# EAGLE board Bmp085Shield (EAGLE 7.3.0)
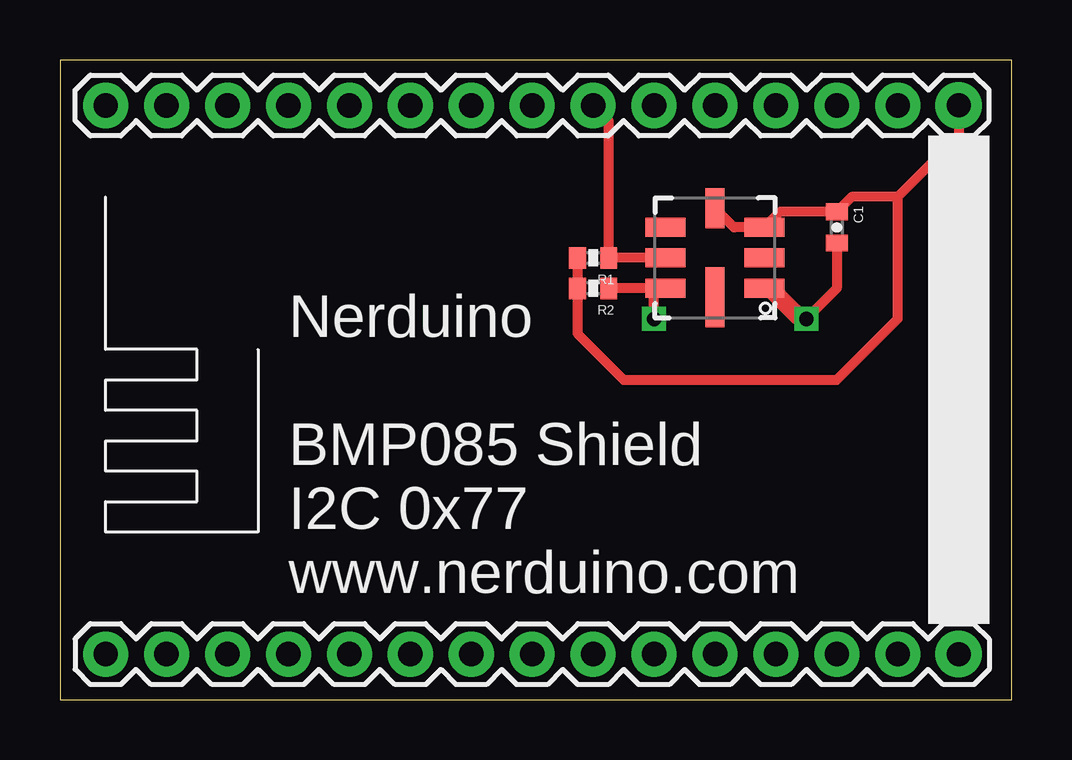
[diagram p0: board, top side]
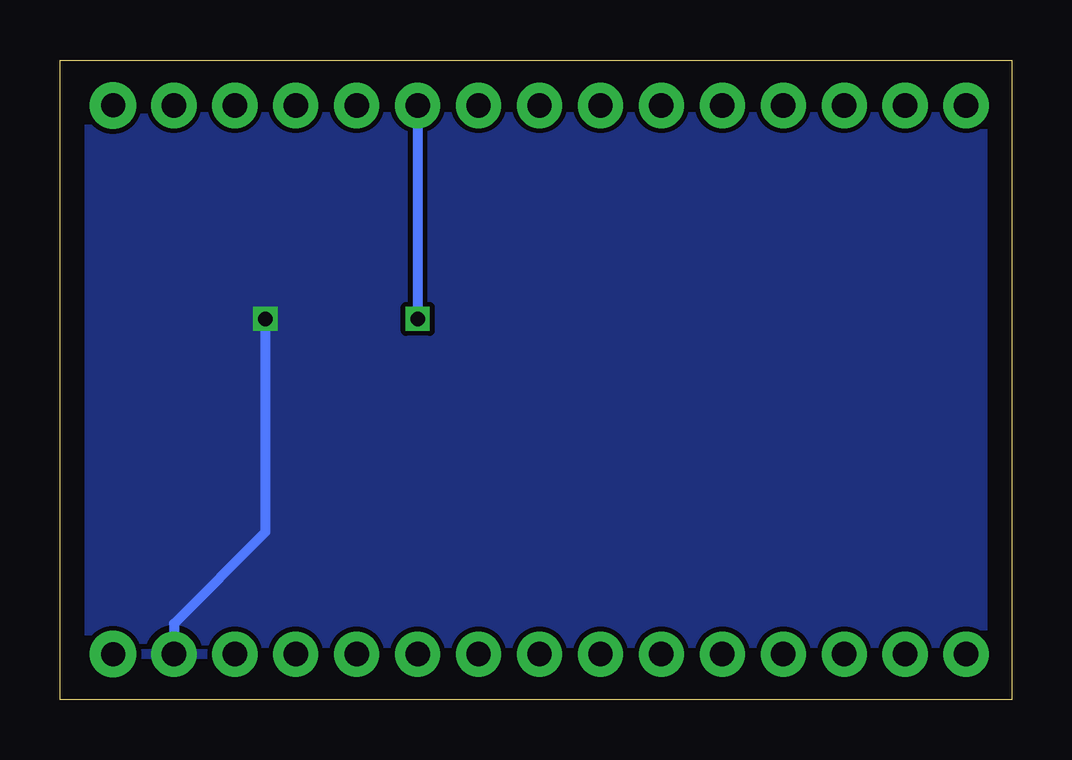
[diagram p1: board, bottom side, seen from below]

Size 39.67 x 26.66 mm. Coordinates in mm from the lower left corner, seen from the top.
Outline: 0,0 39.67,0 39.67,26.66 0,26.66 0,0
Copper layers (1*16): Top 0.035mm / dielectric 1.5mm / Bottom 0.035mm
Design rules "default": minimum track width 10mil, minimum drill 24mil, track to track 8mil, track to pad 8mil, pad to pad 8mil, via to via 8mil, smd to smd 8mil, copper to edge 40mil, drill to drill 8mil, minimum pad ring 10mil, minimum via ring 8mil, stop-mask expansion 4mil, vias tented up to drill 0mil, thermal gap 10mil

## Footprints (pad centres in the part's own frame; a part is rotated, then mirrored left to right if it is on the bottom)
0402-CAP = smd 0.7 x 0.9: 1 -0.65,0; 2 0.65,0
0402-RES = smd 0.7 x 0.9: 1 -0.65,0; 2 0.65,0
NERDUINO_STACK = drill 1.016 pad 1.88: 1 -17.78,-5.08; 2 -15.24,-5.08; 3 -12.7,-5.08; 4 -10.16,-5.08; 5 -7.62,-5.08; 6 -5.08,-5.08; 7 -2.54,-5.08; 8 0,-5.08; 9 2.54,-5.08; 10 5.08,-5.08; 11 7.62,-5.08; 12 10.16,-5.08; 13 12.7,-5.08; 14 15.24,-5.08; 17 15.24,17.78; 18 12.7,17.78; 19 10.16,17.78; 20 7.62,17.78; 21 5.08,17.78; 22 2.54,17.78; 23 0,17.78; 24 -2.54,17.78; 25 -5.08,17.78; 26 -7.62,17.78; 27 -10.16,17.78; 28 -12.7,17.78; 29 -15.24,17.78; 30 -17.78,17.78 | drill 1 pad 1.93: 15 17.78,-5.08; 16 17.78,17.78
BMP085 = smd 1.67 x 0.8: 1 -2.065,1.27; 2 -2.065,0; 3 -2.065,-1.27; 5 2.065,-1.27; 6 2.065,0; 7 2.065,1.27 | smd 0.8 x 1.67: 4 0,-2.065 | smd 0.8 x 2.5: 8 0,1.65

## Placement (x,y rotation side)
C1  0.1uF  [0402-CAP]  32.38,19.69 270 top
R1  4.7k  [0402-RES]  22.23,18.42 180 top
R2  4.7k  [0402-RES]  22.23,17.15 180 top
U$1  NERDSHIELD  [NERDUINO_STACK]  19.69,6.98 0 top
U$2  BMP085  [BMP085]  27.31,18.42 180 top

## Library data of the parts
C1 R1 R2 U$2 = SparkFun
U$1 = NerduinoShieldLib

## Nets
3.3V: C1.1 R1.2 R2.2 U$1.16 U$2.3 U$2.4
GND: C1.2 U$1.14 U$2.1
N$2: R2.1 U$1.21 U$2.7
N$3: R1.1 U$1.22 U$2.6

## Tracks (layer width: path | path; a pad name or v marks a point on that pad's centre or on a via)
3.3V
  Top 0.406: U$1.16 37.46,23.5 34.92,20.96 | 34.92,20.96 33,20.96 C1.1 30.02,20.34 U$2.3 28.1,19.69 U$2.4 | R1.2 R2.2 21.58,15.25 23.5,13.33 32.38,13.33 34.92,15.88 34.92,20.96
GND  (via drill 0.6)
  Top 0.406: C1.2 32.38,17.15 v31.12,15.88 | v31.12,15.88 30.64,15.88 U$2.1 29.85,17.15 v31.12,15.88
  Bottom 0.406: v31.12,15.88 31.12,6.98 34.92,3.17 U$1.14
  pour Bottom: 0.64,26.04 38.73,26.04 38.73,0.64 0.64,0.64
N$2  (via drill 0.6)
  Top 0.406: U$2.7 24.77,17.15 | 24.77,17.15 R2.1 | v24.77,15.88 24.77,17.15
  Bottom 0.406: U$1.21 v24.77,15.88
N$3
  Top 0.406: U$2.6 R1.1 22.88,24.12 U$1.22

## Text on the board
_tsilk: Nerduino / / BMP085 Shield / I2C 0x77 / www.nerduino.com